# Altium PCB Spot Welder Layout.PcbDoc (part 1 of 2)
Units mm, origin at the board's own origin, x right, y up, seen from the top; angles counter-clockwise.
Board outline 154.58 x 106.48 mm, 2 copper layers (Top Layer, Bottom Layer); 118 components, 61 nets, 368 pads, 104 vias.
Unrouted connection lines stored in the file: 1.
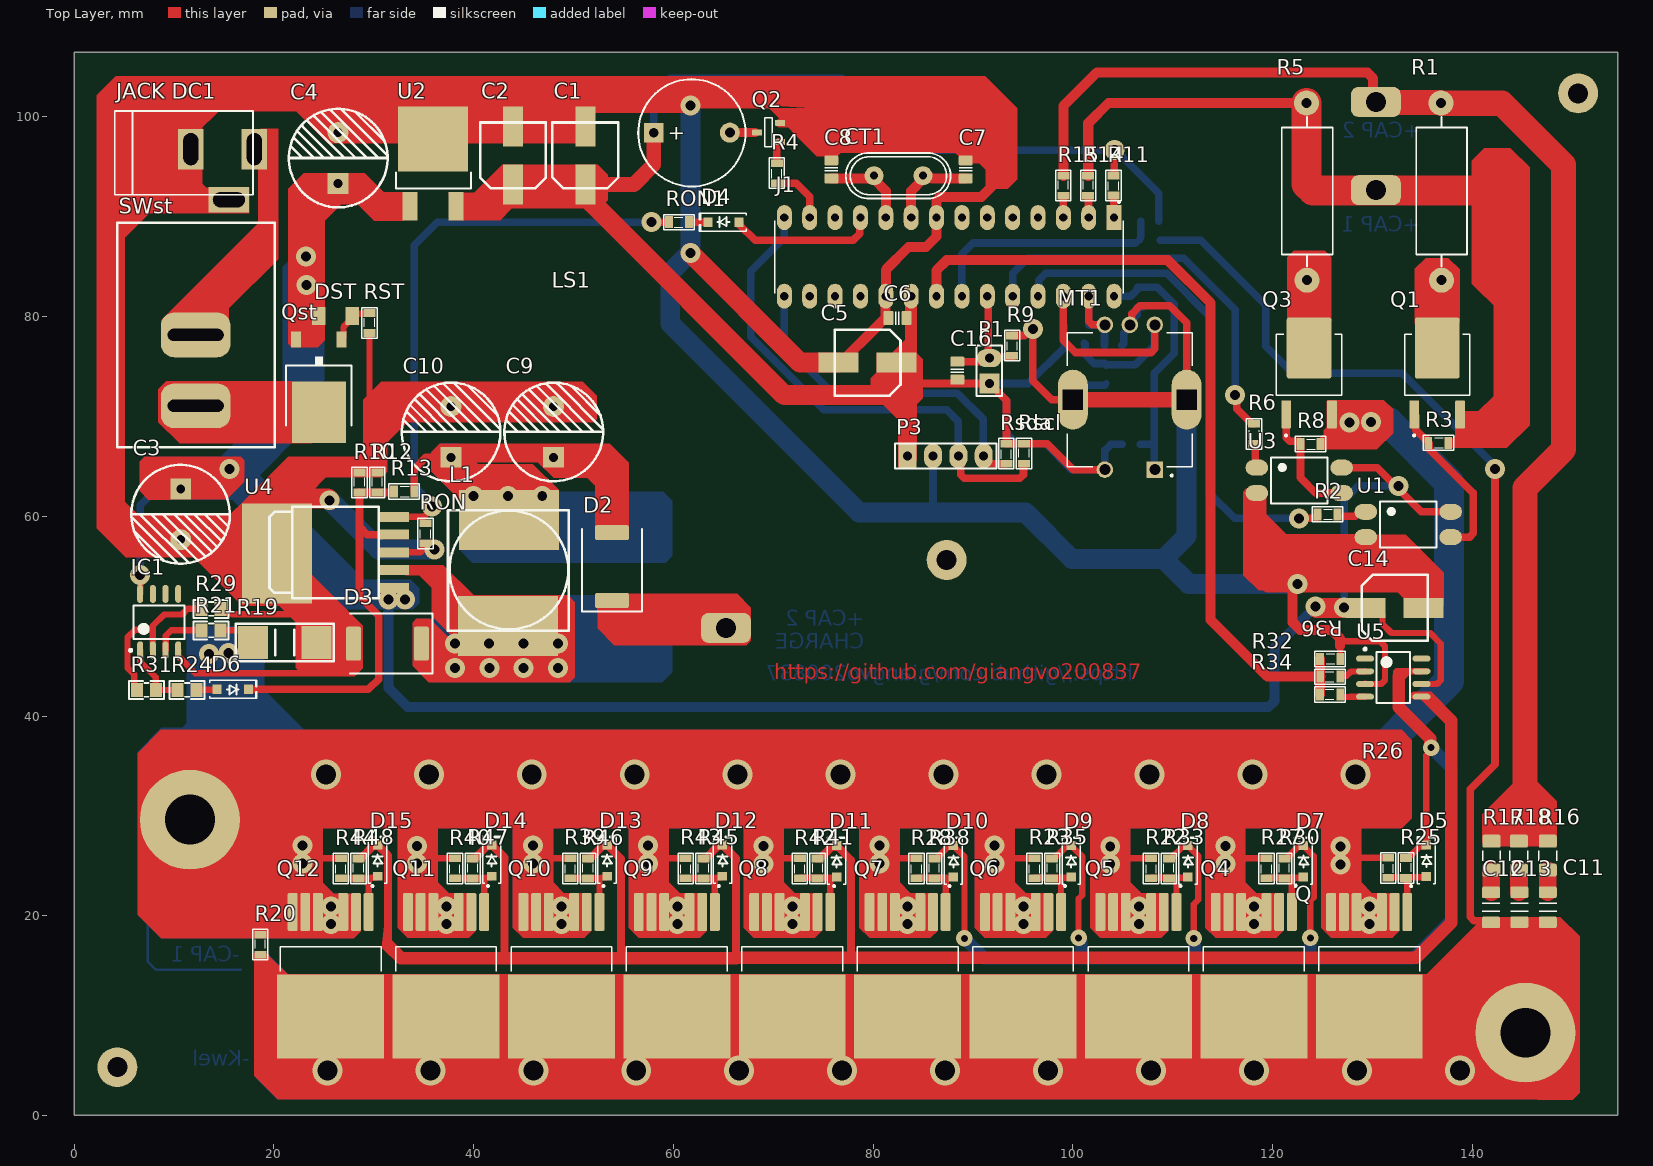
[diagram p0: Top Layer view]
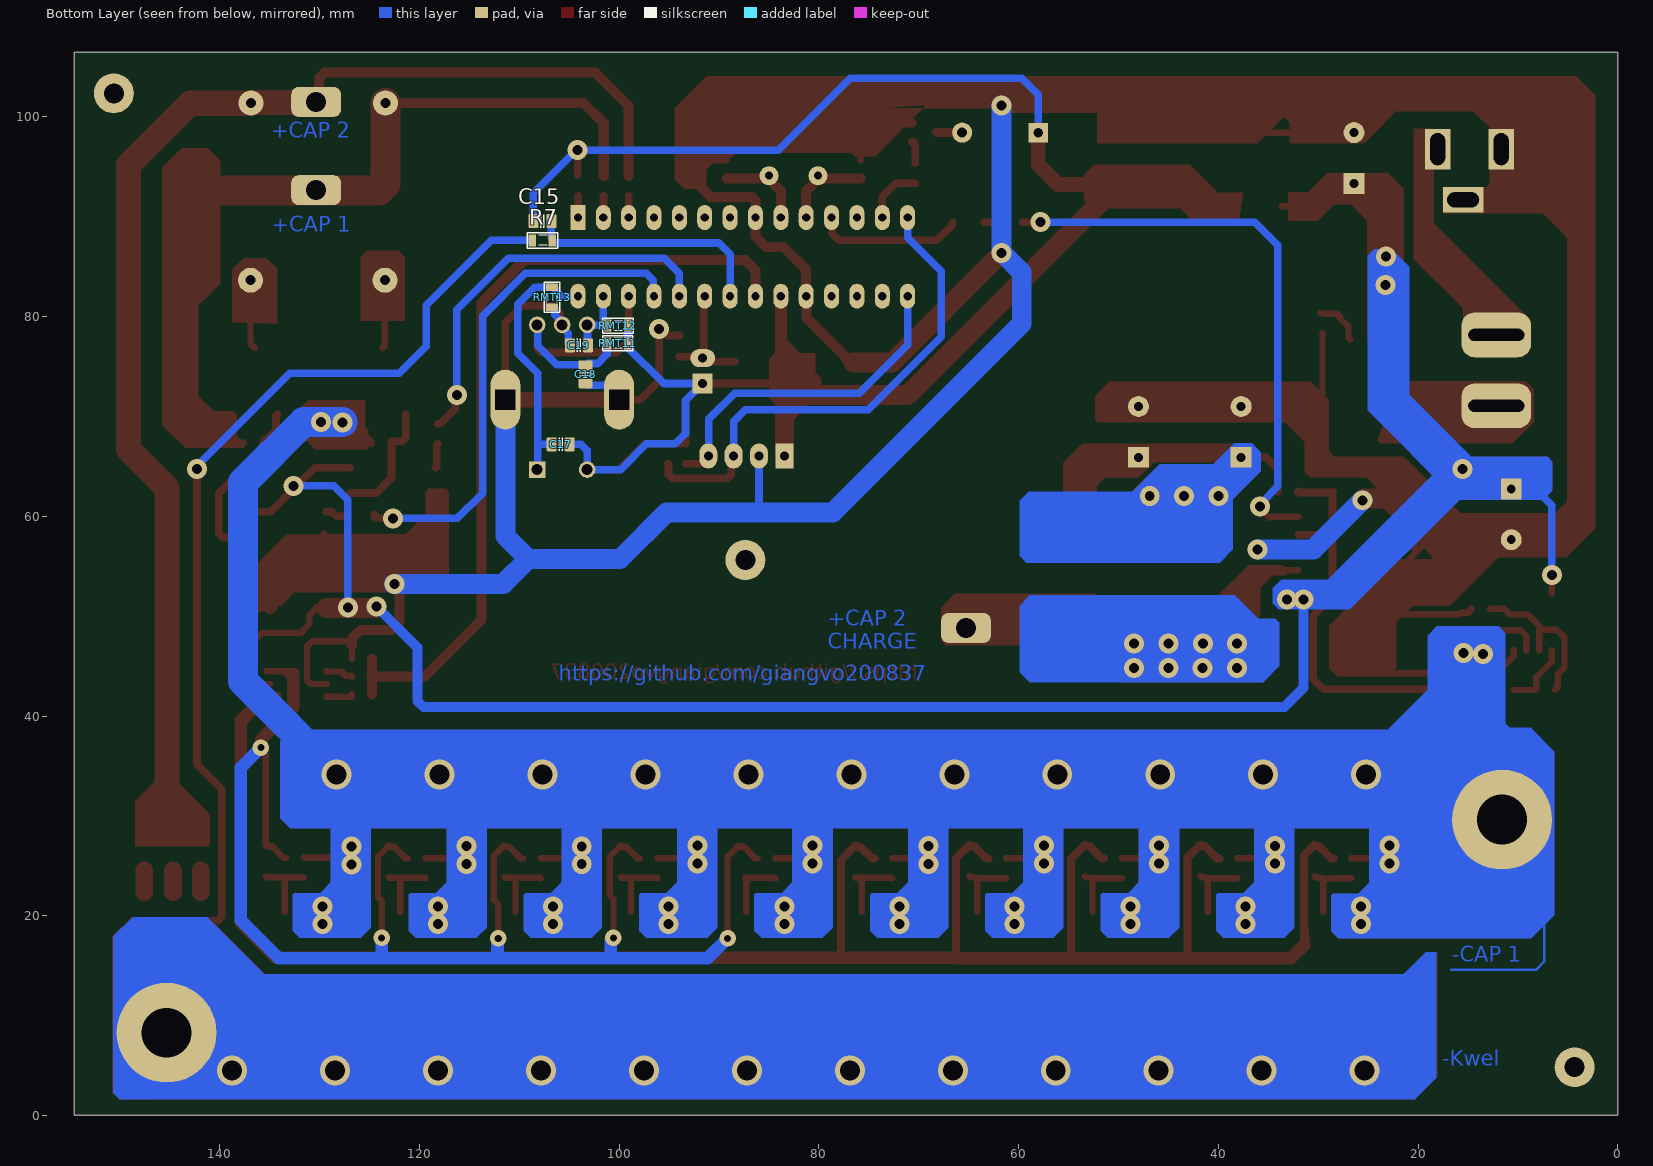
[diagram p1: Bottom Layer view, seen from below]

## Layer stack, top to bottom
Top Solder: solder mask 0.0102, Solder Resist, Dk 3.5
Top Layer: signal copper 0.0356
Dielectric 1: dielectric 0.32, FR-4, Dk 4.8
Bottom Layer: signal copper 0.0356
Bottom Solder: solder mask 0.0102, Solder Resist, Dk 3.5

## Board outline
0,0 154.584,0 154.584,106.477 0,106.477

## Design rules (kind name [scope] priority, off if disabled: settings)
Clearance [All] p1: gap=0.025 ignorepadtopadclearanceinfootprint=FALSE
ComponentClearance [All] p1: gap=0.025 collisioncheckmode=3 verticalgap=0.025 showdistances=FALSE
PolygonConnect [All] p1: connectstyle=Relief reliefconductorwidth=0.254 reliefentries=4 polygonreliefangle="90 Angle" airgapwidth=0.254
RoutingVias [All] p1: holewidth=0.711 width=1.651 viastyle="Through Hole" minholewidth=0.711 minwidth=1.27 maxholewidth=0.711 maxwidth=2.032
SolderMaskExpansion [All] p1: expansion=0.025 istentingtop=FALSE
Width [All] p1: maxlimit=3 minlimit=0.254 preferedwidth=0.635
29 further rules are at their usual default settings.

## Components (designator, comment, footprint, x,y, rotation, side; value= is the part's Value field where it differs from the comment)
C1 "100uF" "tu nhom 6.3 (d)" 51.181,96.14 r90 top
C2 "100uF" "tu nhom 6.3 (d)" 43.942,96.14 r90 top
C3 "1000uF/16V" "tu hoa 10mm" 10.668,60.198 r270 top
C4 "1000uF/16V" "tu hoa 10mm" 26.416,95.885 r90 top
C5 "100uF" "tu nhom 6.3 (d)" 79.451,75.387 r180 top
C6 "approved sub OK" CAPC2012X135N 82.448,79.858 r180 top value=105
C7 "approved sub OK" CAPC2012X135N 89.281,94.742 r270 top value=22pF
C8 "approved sub OK" CAPC2012X135N 75.819,94.742 r270 top value=22pF
C9 "330uF/16V" "tu hoa 10mm" 48.006,68.453 r90 top
C10 "330uF/16V" "tu hoa 10mm" 37.719,68.453 r90 top
C11 "approved sub OK" CAPC3216X180N 147.574,20.852 r90 top value=100nF
C12 "approved sub OK" CAPC3216X180N 141.884,20.828 r90 top value=100nF
C13 "approved sub OK" CAPC3216X180N 144.729,20.852 r90 top value=100nF
C14 "100uF" "tu nhom 6.3 (d)" 132.232,50.825 r0 top
C15 "approved sub OK" CAPC2012X135N 107.696,89.56 r0 bottom value=104
C16 "approved sub OK" CAPC2012X135N 88.443,74.589 r270 top value=104
C17 "approved sub OK" CAPC2012X135N 105.867,67.208 r0 bottom value=104
C18 "approved sub OK" CAPC2012X135N 103.378,74.219 r90 bottom value=104
C19 "approved sub OK" CAPC2012X135N 104.038,77.114 r180 bottom value=104
CT1 "20Mhz" CRYSTAL 82.55,94.107 r0 top value=4Mhz
D2 "SS54" DO-214AB_SMC 53.848,54.966 r90 top value=Shottky-Diode
D3 "SS54" DO-214AB_SMC 31.369,47.244 r180 top value=Shottky-Diode
D4 "S4" "DIODE SOD-123" 65.024,89.459 r180 top
D5 "S4" "DIODE SOD-123" 135.407,25.502 r90 top
D6 "S4" "DIODE SOD-123" 15.875,42.672 r0 top
D7 "S4" "DIODE SOD-123" 123.088,25.451 r90 top
D8 "S4" "DIODE SOD-123" 111.531,25.451 r90 top
D9 "S4" "DIODE SOD-123" 99.847,25.451 r90 top
D10 "S4" "DIODE SOD-123" 88.036,25.451 r90 top
D11 "S4" "DIODE SOD-123" 76.352,25.451 r90 top
D12 "S4" "DIODE SOD-123" 64.922,25.527 r90 top
D13 "S4" "DIODE SOD-123" 53.365,25.527 r90 top
D14 "S4" "DIODE SOD-123" 41.808,25.527 r90 top
D15 "S4" "DIODE SOD-123" 30.378,25.527 r90 top
DST "5.1V" "DIODE ZENNER SMD SOD80" 26.162,80.061 r0 top
IC1 "LM358" "SOp 8" 8.509,49.403 r90 top
J1 "PIC18F252-I/SP" DIP787W46P254L3467H508Q28 87.63,85.979 r270 top
"JACK DC1" "JACK DC 5.5" "JACK DC 5.5" 14.859,94.234 r0 top value="Jac DC"
L1 "33uH - 3A SMD" "Cuon Cam 12x12x10" 49.534,60.622 r180 top
LS1 "Coi Chip Speaker" "Coi Chip Speacker" 58.039,98.412 r0 top
MT1 "Rotary Encoder" XDCR_PEC11R-4215F-S0024 105.715,71.679 r180 top
P1 "Header 2" HDR1X2 91.643,73.304 r90 top
P3 "Header 4" HDR1X4 83.464,66.04 r0 top
Q "IRL40SC228" DPAK127P1524X483-8N 129.692,13.97 r270 top
Q1 "IRFR3710ZTRPBF" TO229P990X239-4N 136.5,74.346 r90 top
Q2 "MBT2222" SOT23-3 69.545,98.45 r180 top
Q3 "IRFR3710ZTRPBF" TO229P990X239-4N 123.673,74.346 r90 top
Q4 "IRL40SC228" DPAK127P1524X483-8N 118.135,13.97 r270 top
Q5 "IRL40SC228" DPAK127P1524X483-8N 106.578,13.97 r270 top
Q6 "IRL40SC228" DPAK127P1524X483-8N 95.021,13.97 r270 top
Q7 "IRL40SC228" DPAK127P1524X483-8N 83.464,13.97 r270 top
Q8 "IRL40SC228" DPAK127P1524X483-8N 71.907,13.97 r270 top
Q9 "IRL40SC228" DPAK127P1524X483-8N 60.35,13.97 r270 top
Q10 "IRL40SC228" DPAK127P1524X483-8N 48.793,13.97 r270 top
Q11 "IRL40SC228" DPAK127P1524X483-8N 37.236,13.97 r270 top
Q12 "IRL40SC228" DPAK127P1524X483-8N 25.679,13.97 r270 top
Qst "AOD409" TO252 24.505,72.289 r270 top
R1 "2R" R2W 136.931,83.642 r90 top
R2 "1k" SM-RES-0805 126.67,60.198 r180 top
R3 "10k" SM-RES-0805 137.77,67.361 r180 top
R4 "2.2k" SM-RES-0805 70.358,93.218 r90 top
R5 "2R" R2W 123.469,83.642 r90 top
R6 "1k" SM-RES-0805 118.161,67.107 r90 top
R7 "1k" SM-RES-0805 106.553,87.63 r0 bottom
R8 "10k" SM-RES-0805 124.968,67.234 r180 top
R9 "10k" SM-RES-0805 93.929,75.946 r90 top
R10 "10k" SM-RES-0805 28.575,64.541 r270 top
R11 "10k" SM-RES-0805 104.089,91.973 r90 top
R12 "10k" SM-RES-0805 30.353,64.541 r270 top
R13 "10k" SM-RES-0805 34.188,62.484 r180 top
R14 "51k" SM-RES-0805 101.549,94.259 r270 top
R15 "51k" SM-RES-0805 99.06,94.259 r270 top
R16 "Thick Film" RESC3216N_ZERO 147.574,26.01 r270 top value=10R
R17 "Thick Film" RESC3216N_ZERO 141.935,26.01 r270 top value=10R
R18 "Thick Film" RESC3216N_ZERO 144.678,26.01 r270 top value=10R
R19 "R004/4mR" "tro smd 2512" 21.082,47.371 r180 top
R20 "10k" SM-RES-0805 18.644,18.263 r270 top
R21 "1k" "tro smd 0805" 13.716,48.514 r180 top
R22 "10k" SM-RES-0805 107.848,23.597 r90 top
R23 "10k" SM-RES-0805 96.164,23.597 r90 top
R24 "10R" "tro smd 0805" 11.303,42.672 r0 top
R25 "10R" SM-RES-0805 133.375,25.933 r270 top
R26 "10k" SM-RES-0805 131.597,23.647 r90 top
R27 "10k" SM-RES-0805 119.405,23.597 r90 top
R28 "10k" SM-RES-0805 84.353,23.597 r90 top
R29 "1k" "tro smd 0805" 13.716,50.673 r180 top
R30 "10R" SM-RES-0805 121.183,25.883 r270 top
R31 "220k" "tro smd 0805" 7.239,42.672 r0 top
R32 "10R" SM-RES-0805 124.638,43.942 r0 top
R33 "10R" SM-RES-0805 109.626,25.883 r270 top
R34 "10R" SM-RES-0805 124.612,42.164 r0 top
R35 "10R" SM-RES-0805 97.942,25.883 r270 top
R36 "4k7" SM-RES-0805 126.924,45.72 r180 top
R38 "10R" SM-RES-0805 86.131,25.883 r270 top
R39 "10k" SM-RES-0805 49.682,23.597 r90 top
R40 "10k" SM-RES-0805 38.125,23.597 r90 top
R41 "10R" SM-RES-0805 74.447,25.883 r270 top
R42 "10k" SM-RES-0805 72.669,23.597 r90 top
R43 "10k" SM-RES-0805 61.239,23.597 r90 top
R44 "10k" SM-RES-0805 26.695,23.597 r90 top
R45 "10R" SM-RES-0805 63.017,25.883 r270 top
R46 "10R" SM-RES-0805 51.46,25.883 r270 top
R47 "10R" SM-RES-0805 39.903,25.883 r270 top
R48 "10R" SM-RES-0805 28.473,25.883 r270 top
RMT11 "5.1k" SM-RES-0805 99.009,77.318 r0 bottom
RMT12 "5.1k" SM-RES-0805 98.984,79.096 r0 bottom
RMT13 "10k" SM-RES-0805 106.731,80.797 r90 bottom
RON "10k" SM-RES-0805 35.179,57.15 r90 top
RON1 "1k" SM-RES-0805 59.411,89.459 r0 top
Rscl "10k" SM-RES-0805 95.123,67.437 r270 top
Rsda "10k" SM-RES-0805 93.345,65.126 r90 top
RST "1k" SM-RES-0805 29.566,80.518 r270 top
SWst "ROCKET SWITCH-10A" SW_2ARS_TH 12.192,71.12 r180 top
U1 "OPTO PC817 SMD" SOP4 133.604,59.182 r0 top value=PC817
U2 "L7805CDT-TR" DPAK_118_446_112X59_SMD 35.814,95.063 r90 top
U3 "OPTO PC817 SMD" SOP4 122.682,63.602 r0 top value=PC817
U4 "LM2576HVS ADJ SMD" TO263-5 26.162,56.388 r90 top
U5 "MIC4424" "SOp 8" 132.105,43.84 r0 top

## Footprints (in the part's own frame and the unit in brackets; to place one, negate y for a bottom-side part, rotate by r counter-clockwise, add the part's x,y. Pads: shape width x height; smd on the part's side, far side on the other; paste and mask are expansions set on the pad)
CAPC2012X135N [mm] "Chip Capacitor, Body 2.0x1.2mm, EIA 0805, IPC Medium Density"
  round 0.254 on Mech15: 0(0,0)
  rrect25% 1x1.4 smd: 1(-0.9,0) 2(0.9,0)
  Top Layer pour cut-out: -0.675,0.7 -0.475,0.9 0.475,0.9 0.675,0.7 0.675,-0.7 0.475,-0.9 -0.475,-0.9 -0.675,-0.7
  silkscreen extent -0.15,-0.65 0.15,0.65, body extent -1.1,-0.72 1.1,0.73, height 1.34
CAPC3216X180N [mm] "Chip Capacitor, Body 3.2x1.6mm, 1.8mm H, EIA 1206, IPC Medium Density"
  round 0.508 on Mech15: 0(0,0)
  rrect25% 1.15x1.8 smd: 1(-1.5,0) 2(1.5,0)
  silkscreen extent -0.4,-0.88 0.4,0.88, body extent -1.7,-0.9 1.7,0.9, height 1.8
"Coi Chip Speacker" [mm]
  rect 2x2 hole 1: 1(0,0)
  round 2 hole 1: 2(7.62,0.013)
  silkscreen extent -1.55,-5.38 9.18,5.36, body extent -2.22,-6 13.24,6, height 4.5
CRYSTAL [mm]
  round 1.905 hole 0.8: 1(-2.45,0) 2(2.45,0)
  silkscreen extent -5.28,-2.29 5.21,2.29, body extent -5.68,-2.36 5.68,2.29, height 3.5
"Cuon Cam 12x12x10" [mm] "Cuon Cam 12x12x10"
  rect 10x6 smd: 1(6.1,11.6) 2(6,1)
  silkscreen extent 0,0 12.1,12.1, body extent 0.1,-0.2 12.1,12.14, height 7.51
"DIODE SOD-123" [mm] "SOD-123"
  rect 0.9x0.95 smd: 1(-1.575,0) 2(1.575,0)
  silkscreen extent -2.3,-0.92 2.41,0.92, body extent -1.86,-0.78 1.86,0.77, height 1.35
"DIODE ZENNER SMD SOD80" [mm] "SOD80"
  rect 1.35x1.8 smd: 1(1.675,0) 2(-1.675,0)
  body extent -1.75,-0.76 1.75,0.74, height 1.45
DIP787W46P254L3467H508Q28 [mm]
  rect 2.5x1.5 hole 0.83: 1(-3.937,16.51)
  oval 2.5x1.5 hole 0.83: 2(-3.937,13.97) 3(-3.937,11.43) 4(-3.937,8.89) 5(-3.937,6.35) 6(-3.937,3.81) 7(-3.937,1.27) 8(-3.937,-1.27) 9(-3.937,-3.81) 10(-3.937,-6.35) 11(-3.937,-8.89) 12(-3.937,-11.43) 13(-3.937,-13.97) 14(-3.937,-16.51) 15(3.937,-16.51) 16(3.937,-13.97) 17(3.937,-11.43) 18(3.937,-8.89) 19(3.937,-6.35) 20(3.937,-3.81) 21(3.937,-1.27) 22(3.937,1.27) 23(3.937,3.81) 24(3.937,6.35) 25(3.937,8.89) 26(3.937,11.43) 27(3.937,13.97) 28(3.937,16.51)
  silkscreen extent -5.6,-17.45 3.62,17.45, body extent -4.06,-17.34 4.06,17.34, height 5.08
DO-214AB_SMC [mm]
  rrect25% 1.5x3.4 smd: A(3.4,0) K(-3.4,0)
  silkscreen extent -4.5,-3 3.75,3, body extent -3.95,-2.9 3.95,2.9, height 2.2
DPAK127P1524X483-8N [mm]
  rrect25% 3.78x0.99 smd: 1(-6.4,3.81) 2-8(-6.4,2.54) 2-8(-6.4,-1.27) 2-8(-6.4,1.27) 2-8(-6.4,-3.81) 2-8(-6.4,-2.54)
  rect 8.44x10.71 smd paste-6: 9(4.07,0)
  silkscreen extent -9.1,-5.05 -0.48,5.05
DPAK_118_446_112X59_SMD [mm] "CASE: DPAK"
  rect 2.85x1.5 smd: 1(-4.023,2.163) 3(-4.023,-2.417)
  rect 6.5x7 smd: 2(2.727,-0.127)
  silkscreen extent -2.22,-3.9 -0.62,3.6, body extent -4.47,-3.43 5.23,3.15, height 2.3
HDR1X2 [mm] "Connector; Header; 2 Position"
  rect 2x2 hole 0.9: 1(0,0)
  oval 1.8x2.5 hole 0.9: 2(2.54,0)
  silkscreen extent -1.27,-1.27 3.81,1.27
HDR1X4 [mm] "Connector; Header; 4 Position"
  rect 1.8x2.5 hole 0.9: 1(0,0)
  oval 1.8x2.5 hole 0.9: 2(2.54,0) 3(5.08,0) 4(7.62,0)
  silkscreen extent -1.27,-1.27 8.89,1.27
"JACK DC 5.5" [mm] "Jac DC input"
  rect 2.54x4.064 hole 1.5 slot 3.2 at 90 deg: 1(3.175,2.54) 2(-3.175,2.54)
  rect 4.064x2.54 hole 1.5 slot 3.2 at 0 deg: 3(0.635,-2.54)
  silkscreen extent -10.79,-2.03 3.05,6.35, body extent -10.42,-2.67 3.4,6.84, height 11.02
R2W [mm] "R2W, 2 pin, 700mil"
  round 2.5 hole 1: 1(0,0) 2(17.755,0.051)
  silkscreen extent 1.37,-2.57 16.38,2.54, body extent -2.36,-3.33 19.84,3.27, height 8.3
RESC3216N_ZERO [mm] "Chip Resistor, Body 3.2x1.6mm, 1206, IPC Medium Density"
  round 0.508 on Mech15: 0(0,0)
  rrect25% 1.3x1.8 smd: 1(-1.45,0) 2(1.45,0)
  silkscreen extent -0.51,-0.89 0.51,0.89, body extent -1.62,-0.82 1.63,0.83, height 0.69
SM-RES-0805 [mil]
  rect 30x47.24 smd: 1(6,0) 2(85,0)
  silkscreen extent -15,-30 105,30, body extent 6,-25 84,25, height 31
SOP4 [mm]
  oval 2.25x1.6 smd: 1(-4.25,1.27) 2(-4.25,-1.27) 3(4.25,-1.27) 4(4.25,1.27)
  silkscreen extent -2.85,-2.3 2.85,2.3, body extent -4.67,-2.29 4.93,2.31, height 3.6
"SOp 8" [mm] "SOIC, 8-Leads, Body 4.9x3.9mm, Pitch 1.27mm, IPC High Density"
  oval 1.8x0.6 smd: 1(-2.825,1.905) 2(-2.825,0.635) 3(-2.825,-0.635) 4(-2.825,-1.905) 5(2.825,-1.905) 6(2.825,-0.635) 7(2.825,0.635) 8(2.825,1.905)
  silkscreen extent -2.95,-2.55 1.68,2.98, body extent -2.99,-2.45 3,2.45, height 1.6
SOT23-3 [mm] "SOT23, 3 pin"
  round 0.5 on Mech15: 0(0,0)
  rrect25% 1x0.6 smd: 1(-1.15,0.95) 2(-1.15,-0.95) 3(1.15,0)
  silkscreen extent -0.38,-1.45 0.38,1.45, body extent -1.4,-1.45 1.4,1.45, height 1.29
SW_2ARS_TH [mm] "CASE: TH"
  rrect60% 7x4.5 hole 1.2 slot 5.6 at 0 deg mask+0.076: 1(0.025,0.051) 2(0.025,-7.049)
  silkscreen extent -7.87,-18.29 7.87,4.19, body extent -7.47,-17.9 7.53,3.8, height 17.81
TO229P990X239-4N [mm]
  rrect25% 2.83x0.97 smd: 1(-4.14,2.29) 3(-4.14,-2.29)
  rrect10% 6.1x4.49 smd paste-4: 4(2.51,0)
  silkscreen extent -6.35,-3.27 3.87,3.27, body extent -3.27,-4.95 3.27,4.95, height 2.51
TO252 [mm]
  rect 1.6x1 smd: 1(-5.435,2.28) 2(-5.435,-2.28)
  rect 6.2x5.4 smd: 3(1.865,0)
  silkscreen extent -3.71,-3.28 3.2,3.28
TO263-5 [mil] "TO263-5"
  rect 39.37x120 smd: 1(-140,-230) 2(-70,-230) 3(0,-230) 4(70,-230) 5(140,-230)
  rect 393.7x275.59 smd: 6(-5,230)
  silkscreen extent -180,-170 180,260, body extent -200,-242 200,310, height 180
"tro smd 0805" [mm]
  rect 1.2x1.4 smd: 1(-0.946,-0.061) 2(0.954,-0.061)
  silkscreen extent -1.75,-0.97 1.75,0.84, body extent -1.56,-0.76 1.44,0.64, height 0.53
"tro smd 2512" [mm]
  rect 3x3.3 smd: 1(-3.2,0) 2(3.2,0)
  silkscreen extent -4.9,-1.88 4.93,1.88, body extent -3.12,-1.57 3.18,1.58, height 0.82
"tu hoa 10mm" [mm]
  rect 2.1x2.1 hole 0.9: 1(-2.54,0)
  round 2.1 hole 0.9: 2(2.54,0)
  silkscreen extent -4.95,-4.96 4.93,4.92, body extent -5,-5 4.97,5, height 20.01
"tu nhom 6.3 (d)" [mm]
  rect 4x2 smd: 1(-2.9,0) 2(2.9,0)
  silkscreen extent -3.3,-3.3 3.3,3.3, body extent -3.8,-3.3 3.8,3.3, height 8
XDCR_PEC11R-4215F-S0024 [mm]
  rect 1.65x1.65 hole 1.1: 1(-2.5,7)
  round 1.65 hole 1.1: 2(2.5,7) A(-2.5,-7.5) B(2.5,-7.5) COM(0,-7.5)
  oval 3x6 hole 2 square: S1(-5.7,0) S2(5.7,0)
  silkscreen extent -6.25,-6.7 6.25,7.7

## Part data
C1 C2 C5 C14: library part "Tu Nhom 100uF 16V", "Dán", Chung_Loai=Dán, Don_Vi=Con, Ma_Hang=MH002219, So_Chan=2, Ten_Linh_Kien="Tụ Nhôm 100uF 16V 6.3x5.4MM"
C3 C4 C9 C10: library part "Tu Hoa 2200uF 16V 10x20", "Cắm", Chung_Loai=Cắm, Don_Vi=Con, Ma_Hang=MH002316, So_Chan=2, Ten_Linh_Kien="Tụ Hóa 2200uF 16V 10x20MM"
C6 C7 C8 C15 C16 C17 C18 C19: library part "CAP C_0805", "Capacitor SMD Cer 1.8nF 10% 50V X7R 0805", Manufacturer 1="AVX Corporation", Manufacturer Part Number 1=08055C182KAT2A, Operating Temperature="-55°C ~ 125°C", Package / Case="0805 (2012 metric)", Ratings="50V; X7R", Supplier Part Number 1=478-1374-1-ND, Tolerance=±10%, SCDType=source*, Supplier 1=Digi-Key
C11 C12 C13: library part "CAP C_1206", "Capacitor SMD Cer 220nF 10% 16V X7R 1206", Manufacturer 1=Murata, Manufacturer Part Number 1=GRM319R71C224KA01D, Package / Case="1206 (3216 metric)", Ratings="16V; X7R", Supplier Part Number 1=81-GRM426X224K016D, Tolerance=±10%, SCDType=spec, Supplier 1=Mouser
CT1: library part CRYSTAL, "Crystal For all Crystal 2pin."
D2 D3: library part Schottky-Diode, Datasheet=https://diotec.com/de/produktliste/SBD.html, ki_description="Schottky Diode", ki_keywords=Schottky, Reference=D
D4 D5 D6 D7 D8 D9 D10 D11 D12 D13 D14 D15: library part "Diode S4", "Dán", Chung_Loai=Dán, Don_Vi=Con, Ma_Hang=MH005519, Ten_Linh_Kien="Diode S4 SOD123 ( 1N5819 SOD123)"
DST: library part "Diode Zener 5.1V", "Dán", Chung_Loai=Dán, Don_Vi=Con, Ma_Hang=MH002881, Ten_Linh_Kien="Diode Zener 1/2W 5.1V SMD1206 ZMM5.1"
IC1: "Low-Power Dual Operational Amplifier"
J1: "PIC PICÂ® 18F Microcontroller IC 8-Bit 40MHz 32KB (16K x 16) FLASH 28-SPDIP", Package="SPDIP-28 Microchip", Availability="In Stock", Check_prices=https://www.snapeda.com/parts/PIC18F252-I/SP/Microchip/view-part/?ref=eda, MF="Microchip Technology", MP=PIC18F252-I/SP, Price=None, Purchase-URL=https://pricing.snapeda.com/search/part/PIC18F252-I/SP/?ref=eda, SnapEDA_Link=https://www.snapeda.com/parts/PIC18F252-I/SP/Microchip/view-part/?ref=snap
L1: library part "CUON CAM 100uH SMD", "Dán", Chung_Loai=Dán, Don_Vi=Con, Ten_Linh_Kien="Cuộn Cảm 100uH 7x7x4MM CD74"
LS1: "Còi chip"
MT1: library part PEC11R-4215F-S0024, "Incremental Encoder, 12 Mm, Contact Rating 10 Ma - 5 Vdc", Package=None, Availability=Unavailable, MP=PEC11R-4215F-S0024, Price=None
P1: "Header, 2-Pin", LatestRevisionDate=17-Jul-2002, LatestRevisionNote="Re-released for DXP Platform.", Publisher="Altium Limited"
P3: "Header, 4-Pin", LatestRevisionDate=17-Jul-2002, LatestRevisionNote="Re-released for DXP Platform.", Publisher="Altium Limited"
Q Q4 Q5 Q6 Q7 Q8 Q9 Q10 Q11 Q12: library part IPT020N10N5, "OptiMOSâ„¢ 5 100V power MOSFET in TO-Leadless (TOLL) package with 60% space reduction for telecom and low voltage drives applications", Package="HSOF-8 Infineon Technologies", Availability=Unavailable, MF="Infineon Technologies", MP=IPT020N10N5, Price=None, SnapEDA_Link=https://www.snapeda.com/parts/IPT020N10N5/Infineon%20Technologies/view-part/4624899/?ref=snap
Q1 Q3: "N-Channel 100 V 42A (Tc) 140W (Tc) Surface Mount D-Pak", Package="TO-252 International Rectifier", Availability="In Stock", Check_prices=https://www.snapeda.com/parts/IRFR3710ZTRPBF/Infineon/view-part/?ref=eda, MF=Infineon, MP=IRFR3710ZTRPBF, Price=None, Purchase-URL=https://pricing.snapeda.com/search/part/IRFR3710ZTRPBF/?ref=eda, SnapEDA_Link=https://www.snapeda.com/parts/IRFR3710ZTRPBF/Infineon/view-part/?ref=snap
Q2: library part NPN_MMBT2222A, "Transistor SMD NPN 40V 600mA 250mW SOT23-3", Manufacturer 1="Fairchild Semiconductor", Manufacturer 2="NXP Semiconductors", Manufacturer Part Number 1=MMBT2222A, Package / Case=SOT-23, Ratings="40V; 600mA; 250mW", Supplier Part Number 1=MMBT2222AFSTR-ND, Manufacturer Part Number 2=MMBT2222A, Material=Si, Mounting Type="Surface Mount", SCDType=source, Supplier 1=Digi-Key, Supplier 2=Digi-Key, Supplier Part Number 2=568-4509-2-ND
Qst: "P-Channel 60V 26A (Tc) 2.5W (Ta), 60W (Tc) Surface Mount TO-252, (D-Pak)", Package="TO-252 Alpha &amp; Omega Semiconductor", Availability=Unavailable, DigiKey-Purchase-URL=https://snapeda.com/shop?store=DigiKey&id=554087, MF="Alpha &", MP=AOD409, Price=None, SnapEDA_Link=https://www.snapeda.com/parts/AOD409/Alpha%20&%20Omega%20Semiconductor%20Inc./view-part/554087/?ref=snap
R1 R5: library part Res, "Res"
R2 R3 R4 R6 R7 R8 R9 R10 R11 R12 R13 R14 R15 R20 R22 R23 R25 R26 R27 R28 R30 R32 R33 R34 R35 R36 R38 R39 R40 R41 R42 R43 R44 R45 R46 R47 R48 RMT11 RMT12 RMT13 RON RON1 Rscl Rsda RST: library part "Res SMD", "Res"
R16 R17 R18: library part RES_1206, "Resistor SMD chip 0.0 Ohm 0.25W 1206", Manufacturer 1=Vishay/Dale, Manufacturer Part Number 1=CRCW12060000Z0EA, Package / Case="1206 (3216 metric)", Ratings=1/4W, Supplier Part Number 1=541-0.0ECT-ND, Tolerance=±5%, SCDType=spec*\?, Supplier 1=Digi-Key
R19: library part "Tro 2512 5% 0.1R", "Dán", Chung_Loai=Dán, Don_Vi=Con, Ma_Hang=MH004711, So_Chan=2, Ten_Linh_Kien="Trở 2512 5% 0.1R 1W"
R21 R24 R29: library part "Tro 0805 1% 1k", "Dán", Chung_Loai=Dán, Don_Vi=Con, Ma_Hang=MH005468, So_Chan=2, Ten_Linh_Kien="Trở 0805 1% 1k"
R31: library part "Tro 0805 1% 33k", "Dán", Chung_Loai=Dán, Don_Vi=Con, Ma_Hang=MH005478, So_Chan=2, Ten_Linh_Kien="Trở 0805 1% 33k"
SWst: library part SW1_10A-SRB23A2BBBNN-TH, "Rocker Switch SPDT 10A (AC) 125V Panel Mount, Snap-In", Alternate Part Number-1=NA, Case/Package=TH, Manufacturer="ITT C&K", Manufacturer Part Number=SRB23A2BBBNN, Supplier Part Number-1=SRB23A2BBBNN, Supplier-1="SP ROAD"
U1 U3: "Single Opto"
U2: library part REG_35V_5V-1.5A-7.5W-DPAK, "Linear Voltage Regulator IC 1 Output 1.5A DPAK", Alternate Part Number-1="CJ7805 3%", Case/Package=DPAK, Manufacturer=Diodes, Manufacturer Part Number=L7805CDT-TR, Supplier Part Number-1=L7805CDT-TR, Supplier-1="SP ROAD"
U4: "Dán", Chung_Loai=Dán, Don_Vi=Con, Ma_Hang=MH002361, Ten_Linh_Kien="LM2576HVS-ADJ BUCK ADJ 3A TO263-5"

## Free pads (board coordinates)
  rrect50% 5x3 hole 2: 2(65.278,48.819) 2(130.353,92.659) 2(130.353,101.498)
  round 10 hole 5: 3(11.582,29.616) 3(145.339,8.28)
  round 4 hole 2: 4(4.318,4.826) 4(87.376,55.626) 4(150.622,102.362)

## Via types
v1: diameter 2, hole 1, Top Layer to Bottom Layer, 76 vias
v2: diameter 3, hole 2, Top Layer to Bottom Layer, 23 vias
v3: diameter 1.651, hole 0.711, Top Layer to Bottom Layer, 5 vias

## Nets (pads, with @x,y where several pads share a name; then routed paths per layer and width w, separated by ;. In a path a pad name is that pad's centre, name@x,y a point inside that pad or via, vN(x,y) a via of type N, cw(c..) or ccw(c..) an arc to the next point about the centre after c; other vN are vias at no path point)
+5: C1.1 C2.1 C5.1 C6.1 C15.2 C16.2 C17.1 J1.20 LS1.1 MT1.2 P1.1 P3.1 R11.2 RMT11.1 RMT12.1 Rscl.1 Rsda.2 U2.3 | length 206.4
  Top Layer w0.635: U2.3@38.231,91.04 40.24,91.04 42.44,93.24 C2.1@43.942,93.24 C1.1@51.181,93.24 51.864,92.558 C1.1@51.864,91.392 ; C5.1@82.351,75.387 82.934,75.387 83.617,74.705 83.617,73.304 83.617,72.136 P3.1@83.617,66.04 ; C5.1@83.82,75.562 J1.20@83.82,82.042 ; Rsda.2@93.345,67.285 Rsda.2@93.37,67.31 ; R11.2@104.089,94.132 R11.2@104.14,94.183 ; v1@104.14,96.622 v1(104.191,96.672)
  Top Layer w0.762: 83.617,73.304 P1.1@91.643,73.304 93.37,71.577 Rsda.2@93.37,67.31 ; Rsda.2@93.345,67.285 Rscl.1@95.123,67.285 97.46,67.285 100.066,64.679 MT1.2@103.215,64.679 ; R11.2@104.14,94.183 v1@104.14,96.622
  Top Layer w1.5: C1.1@51.181,93.24 51.864,93.24 56.054,93.24 58.039,95.225 LS1.1@58.039,98.412
  Top Layer w2: C1.1@51.864,91.392 71.12,72.136 83.617,72.136
  Bottom Layer w0.762: LS1.1@58.039,98.412 58.039,102.235 59.69,103.886 76.86,103.886 84.074,96.672 v1(104.191,96.672) 104.292,96.672 108.596,92.369 C15.2@108.596,89.56 ; RMT12.1@99.136,79.096 99.136,76.886 95.555,73.304 P1.1@91.643,73.304 93.37,71.577 93.37,68.275 94.386,67.259 97.282,67.259 99.862,64.679 MT1.2@103.215,64.679 103.215,66.588 103.835,67.208 C17.1@104.967,67.208
A: C18.2 J1.26 MT1.A RMT11.2 | length 28.1
  Top Layer w0.762: J1.26@99.06,82.042 99.06,77.622 100.279,76.403 107.843,76.403 108.215,76.775 MT1.A@108.215,79.179
  Bottom Layer w0.762: RMT11.2@101.168,77.318 101.232,77.254 101.232,76.213 102.143,75.301 103.195,75.301 C18.2@103.378,75.119 103.443,75.184 106.274,75.184 108.153,77.064 108.153,79.117 MT1.A@108.215,79.179
B: C19.2 J1.27 MT1.B RMT12.2 | length 10.8
  Top Layer w0.762: J1.27@101.6,82.042 101.6,79.551 101.972,79.179 MT1.B@103.215,79.179
  Bottom Layer w0.762: J1.27@101.6,82.042 101.6,79.188 101.651,79.137 103.173,79.137 MT1.B@103.177,79.141 ; C19.2@103.138,77.114 103.177,77.153 MT1.B@103.177,79.141 ; MT1.B@103.215,79.179 MT1.B@103.177,79.141
BATT-: pad.3@11.582,29.616 Q3.3 Q4.2-8 Q5.2-8 Q6.2-8 Q7.2-8 Q8.2-8 Q9.2-8 Q10.2-8 Q11.2-8 Q12.2-8 Q.2-8 R8.1 R19.2 R20.1 R21.1 R22.2 R23.2 R26.2 R27.2 R28.2 R39.2 R40.2 R42.2 R43.2 R44.2 | length 115.1
  Top Layer w0.635: R21.1@14.662,48.575 16.699,48.575 17.882,47.392 R19.2@17.882,47.371 16.841,46.33 v1(15.443,46.33) ; R20.1@18.593,18.161 R20.1@18.644,18.11 18.644,19.456 20.066,20.879 21.692,20.879 21.869,20.701 Q12.2-8@21.869,20.37 ; v1@23.266,25.603 23.571,25.603 23.724,25.756 R44.2@26.695,25.756 ; v1@34.696,25.857 34.798,25.756 R40.2@38.125,25.756 ; v1@46.482,25.857 46.533,25.857 46.634,25.756 R39.2@49.682,25.756 ; v1@58.115,25.908 58.268,25.756 R43.2@61.239,25.756 ; v1@69.393,25.908 69.545,25.756 R42.2@72.669,25.756 ; 81.737,25.959 81.94,25.756 R28.2@84.353,25.756 ; v1@92.456,25.603 92.608,25.756 R23.2@96.164,25.756 ; v2@97.333,34.2 v2(97.384,34.149) ; 104.851,25.756 R22.2@107.848,25.756 ; 116.332,25.654 116.434,25.756 R27.2@119.405,25.756 ; R8.1@124.816,67.234 124.816,67.453 125.795,68.432 125.795,70.038 Q3.3@125.963,70.206 125.963,69.608 126.13,69.441 v1(129.85,69.441) ; v1@127.254,25.857 127.305,25.806 R26.2@131.597,25.806
  Bottom Layer w0.254: 7.366,19.304 7.366,15.392 8.179,14.58 16.662,14.58
  Bottom Layer w0.635: v1(13.513,46.228) 13.868,46.228 13.97,46.33 v1(15.443,46.33)
  Bottom Layer w3: v1@127.711,69.441 v1(129.85,69.441) 131.626,69.441 137.668,63.398 137.668,43.496 v2(128.321,34.149)
  other v1: 25.705,19.152 37.287,19.152 48.819,19.152 60.401,19.152 71.933,19.152 83.464,19.152 95.047,19.152 106.629,19.152 118.161,19.152 129.743,19.152 25.705,20.93 37.287,20.93 48.819,20.93 60.401,20.93 71.933,20.93 83.464,20.93 95.047,20.93 106.629,20.93 118.161,20.93 129.743,20.93 126.797,25.146 103.757,25.166 34.345,25.208 69.037,25.197 115.316,25.197 22.86,25.248 45.923,25.248 57.455,25.248 80.67,25.248 92.151,25.248 126.797,26.924 103.757,26.944 34.345,26.986 69.037,26.975 115.316,26.975 22.86,27.026 45.923,27.026 57.455,27.026 80.67,27.026 92.151,27.026 127.711,69.393
  other v2: 25.197,34.149 35.509,34.149 45.822,34.149 56.134,34.149 66.446,34.149 76.759,34.149 87.071,34.149 107.696,34.149 118.008,34.149
CTRC: RON1.1 RON.2 U4.5 | length 57.8
  Top Layer w0.635: U4.5@32.004,59.944 34.798,59.944 34.896,59.846 35.814,60.763 v1(35.814,60.96)
  Top Layer w0.762: v1(57.81,89.459) RON1.1@59.563,89.459
  Bottom Layer w0.762: v1(35.814,60.96) 35.814,61.23 34.036,63.008 34.036,87.122 36.373,89.459 v1(57.81,89.459)
DS0: J1.24 R6.2 | length 39.7
  Top Layer w0.762: v1(116.23,72.136) 116.425,71.942 116.425,70.783 117.942,69.266 R6.2@118.161,69.266
  Bottom Layer w0.762: J1.24@93.98,82.042 93.98,84.328 95.504,85.852 111.1,85.852 116.281,80.67 116.281,72.187 v1(116.23,72.136)
DS1: J1.25 R2.2 | length 50.7
  Top Layer w0.762: v1(122.657,59.792) 124.075,59.792 124.199,59.915 124.447,59.915 124.511,59.979 R2.2@124.511,60.198
  Bottom Layer w0.762: J1.25@96.52,82.042 96.577,82.099 96.577,83.623 97.282,84.328 109.423,84.328 113.69,80.061 113.69,62.332 116.23,59.792 v1(122.657,59.792)
FB: D6.2 R10.2 R12.2 R13.2 U4.4 | length 40.3
  Top Layer w0.762: D6.2@17.45,42.672 29.464,42.672 30.48,43.688 30.48,50.038 28.575,51.943 28.575,58.928 ; R10.2@28.511,62.446 R10.2@28.575,62.382 ; U4.4@32.004,58.166 29.337,58.166 28.575,58.928 ; R13.2@32.029,62.484 32.029,62.446 31.966,62.382 R12.2@30.353,62.382 R10.2@28.575,62.382 ; 28.575,58.928 R10.2@28.575,62.382
GND: "JACK DC1.2" "JACK DC1.3" C1.2 C2.2 C3.2 C4.2 C5.2 C6.2 C7.1 C8.1 C9.2 C10.2 C14.2 C18.1 C19.1 D3.A IC1.4 J1.8 J1.19 MT1.COM MT1.S1 MT1.S2 P3.2 Q2.2 R9.2 R10.1 R12.1 R19.1 R29.1 R36.1 RMT13.1 RON.1 RST.2 U1.2 U2.2 U3.2 U4.3 U4.6 U5.3 | length 540.5
  Top Layer w0.635: IC1.4@10.414,46.578 10.414,46.013 12.129,44.298 23.91,44.298 24.282,44.67 R19.1@24.282,47.371 ; R29.1@14.662,50.734 14.662,50.634 14.944,50.351 15.689,50.351 15.85,50.19 23.495,50.19 ; 15.494,91.694 12.573,91.694 11.684,92.583 11.684,96.774 ; 23.012,61.773 23.063,61.824 ; D3.A@27.969,47.244 24.409,47.244 R19.1@24.282,47.371 ; 29.362,71.018 29.566,71.222 RST.2@29.566,78.359 ; U4.3@32.004,56.388 34.68,56.388 34.896,56.604 34.896,57.239 34.96,57.302 RON.1@35.179,57.302 ; C9.2@48.006,70.993 47.981,70.968 37.719,70.968 31.09,70.968 30.353,70.231 R12.1@30.353,64.389 R10.1@28.575,64.389 28.55,64.414 21.234,64.414 20.32,63.5 U4.6@20.32,56.261 ; v1@61.722,100.723 51.864,100.723 51.181,100.04 C1.2@51.181,99.04 50.566,98.425 43.942,98.425 35.941,98.425 C4.2@26.416,98.425 26.416,101.092 25.908,101.6 13.081,101.6 11.684,100.203 11.684,96.774 ; 74.437,99.4 75.819,98.019 75.819,96.83 ; C8.1@75.819,95.642 75.819,96.83 ; J1.19@81.229,81.991 J1.19@81.28,82.042 ; 92.716,93.841 90.916,95.642 C7.1@89.281,95.642 89.256,95.667 89.256,96.351 88.884,96.723 75.926,96.723 75.819,96.83 ; U3.2@118.432,62.332 118.432,58.504 119.024,57.912 U1.2@129.354,57.912 129.354,53.154 129.337,53.137 ; R36.1@126.771,45.72 126.771,47.041 ; 126.771,47.777 127.051,47.498 130.759,47.498 131.267,46.99 131.267,43.577 130.895,43.205 U5.3@129.28,43.205 U5.3@129.298,43.223 ; C14.2@135.132,50.825 136.02,50.825 C14.2@136.703,50.143 ; 11.684,96.774 5.486,96.774 4.775,96.063 4.775,58.928 6.045,57.658 C3.2@10.668,57.658 18.923,57.658 U4.6@20.32,56.261 ; U4.6@20.32,56.261 23.495,53.086 23.495,50.19 ; 23.495,50.19 23.495,50.165 24.511,49.149 24.511,47.6 R19.1@24.282,47.371
  Top Layer w0.762: R9.2@93.929,78.105 95.171,78.105 95.806,78.74 v1(96.012,78.74) 96.012,73.558 97.892,71.679 MT1.S2@100.015,71.679 ; MT1.COM@105.715,79.179 105.909,79.373 105.909,80.255 106.731,81.077 109.728,81.077 111.415,79.39 MT1.S1@111.415,71.679
  Top Layer w0.889: Q2.2@70.695,99.4 74.437,99.4
  Top Layer w1: C5.2@76.551,75.387 77.407,75.887 77.407,76.037 77.491,76.121 cw(c77.864,75.193) 77.494,76.122 79.513,78.141 81.229,79.858 J1.19@81.229,81.991 ; J1.19@81.28,82.042 81.28,84.684 83.566,86.97 85.293,86.97 86.36,88.036 J1.8@86.36,89.916 86.36,91.627 86.732,91.999 90.873,91.999 92.716,93.841 ; C14.2@134.974,50.984 C14.2@135.132,50.825
  Top Layer w1.016: v1@122.022,52.578 122.022,49.378 122.784,48.616 125.933,48.616 126.771,47.777 126.771,47.041
  Top Layer w1.5: 119.57,53.137 129.337,53.137 134.315,53.137 134.974,52.478 C14.2@134.974,50.984
  Top Layer w1.524: MT1.S2@100.015,71.679 MT1.S1@111.415,71.679
  Top Layer w2: 23.012,61.773 25.412,61.773 v1(25.578,61.607) ; v1(61.722,86.36) 72.695,75.387 C5.2@76.551,75.387
  Bottom Layer w0.635: 86.004,60.909 86.512,60.401 ; MT1.S2@100.218,71.476 MT1.S2@100.015,71.679 100.015,72.044 MT1.S2@101.107,73.136 ; C18.1@103.195,73.136 C18.1@103.378,73.319 ; MT1.S1@111.212,71.476 111.404,71.668 MT1.S1@111.415,71.679 MT1.S1@111.354,71.74
  Bottom Layer w0.762: 86.004,60.909 P3.2@86.004,66.04 ; MT1.S2@101.107,73.136 C18.1@103.195,73.136 ; C19.1@104.938,77.114 105.121,77.297 105.121,78.31 105.715,78.904 MT1.COM@105.715,79.179 105.715,79.453 106.448,80.187 106.448,80.886 106.512,80.95 RMT13.1@106.731,80.95 RMT13.1@106.95,80.95
  Bottom Layer w1: J1.19@81.178,81.94 J1.19@81.28,82.042
  Bottom Layer w2: v1(25.578,61.607) 30.492,56.693 v1(36.068,56.693) ; v1@61.673,86.409 59.69,84.426 59.69,79.299 78.588,60.401 86.512,60.401 95.25,60.401 99.924,55.728 109.118,55.728 ; MT1.S1@111.404,71.668 111.404,58.014 109.118,55.728 ; v1@122.58,53.238 111.608,53.238 109.118,55.728
  Bottom Layer w2.032: v1(61.722,86.36) v1(61.722,101.143)
  other v1: 122.517,53.2
LOAD-: C11.1 C12.1 C13.1 pad.3@145.339,8.28 Q4.9 Q5.9 Q6.9 Q7.9 Q8.9 Q9.9 Q10.9 Q11.9 Q12.9 Q.9 R7.2 R20.2 | length 236.4
  Top Layer w0.635: R20.2@18.644,16.104 18.644,14.58 19.761,13.462 22.117,13.462 Q12.9@25.679,9.9 Q11.9@37.236,9.9 Q10.9@48.793,9.9 Q9.9@60.35,9.9 Q8.9@71.907,9.9 Q7.9@83.464,9.9 Q6.9@95.021,9.9 Q5.9@106.578,9.9 Q4.9@118.135,9.9 Q.9@129.692,9.9 142.336,9.9 144.577,12.141 144.577,18.68
  Top Layer w0.762: v1(142.291,64.719) 142.291,35.154 139.802,32.664 139.802,19.879 140.174,19.507 141.705,19.507 C12.1@141.884,19.328 141.896,19.34 C13.1@144.729,19.34 ; C13.1@144.729,19.352 C13.1@144.729,19.34 ; C11.1@147.574,19.352 147.562,19.34 C13.1@144.729,19.34
  Bottom Layer w0.762: R7.2@108.775,87.63 112.827,87.63 119.329,81.128 119.329,77.013 122.022,74.32 132.994,74.32 142.291,65.024 v1(142.291,64.719)
  other v2: 25.349,4.5 35.662,4.5 45.974,4.5 56.286,4.5 66.599,4.5 76.911,4.5 87.224,4.5 97.536,4.5 107.848,4.5 118.161,4.5 128.473,4.5 138.786,4.5
NetC7_2: C7.2 CT1.2 J1.9 | length 9.1
  Top Layer w1: J1.9@83.82,89.916 83.82,92.593 85,93.773 CT1.2@85,94.107 85.173,93.934 85.813,93.934 85.905,93.842 C7.2@89.281,93.842
NetC8_2: C8.2 CT1.1 J1.10 | length 9.1
  Top Layer w1: C8.2@75.819,93.842 79.59,93.842 79.855,94.107 CT1.1@80.1,94.107 80.1,93.773 81.28,92.593 J1.10@81.28,89.916
NetC9_1: C9.1 C10.1 D2.A L1.2 R13.1 | length 18.9
  Top Layer w0.635: C9.1@48.006,65.913 52.248,65.913 53.848,64.313 D2.A@53.848,58.366
  Top Layer w0.762: R13.1@34.036,62.484 34.036,64.719 35.23,65.913 C10.1@37.719,65.913
  other v1: 39.997,62.027 43.434,62.027 46.871,62.027
NetC11_2: C11.2 R16.2 | length 2.2
  Top Layer w1.778: C11.2@147.574,22.352 R16.2@147.574,24.56
NetC12_2: C12.2 R17.2 | length 2.3
  Top Layer w0.635: C12.2@141.884,22.328 C12.2@141.91,22.353 ; R17.2@141.91,24.534 R17.2@141.935,24.56
  Top Layer w1.778: C12.2@141.91,22.353 R17.2@141.91,24.534
NetC13_2: C13.2 R18.2 | length 2.2
  Top Layer w0.635: R18.2@144.678,24.56 R18.2@144.704,24.534 ; C13.2@144.704,22.377 C13.2@144.729,22.352
  Top Layer w1.778: C13.2@144.704,22.377 R18.2@144.704,24.534
NetC15_1: C15.1 J1.22 R7.1 | length 24.1
  Top Layer w0.635: J1.22@88.9,82.042 J1.22@88.925,82.017
  Bottom Layer w0.635: R7.1@106.705,87.63 106.705,87.849 R7.1@106.796,87.94
  Bottom Layer w0.762: J1.22@88.9,82.042 88.9,86.258 90.018,87.376 106.259,87.376 106.294,87.411 ; R7.1@106.796,87.94 C15.1@106.796,89.56